# EAGLE board S50_Controller_Rev0_4 (EAGLE 9.6.2)
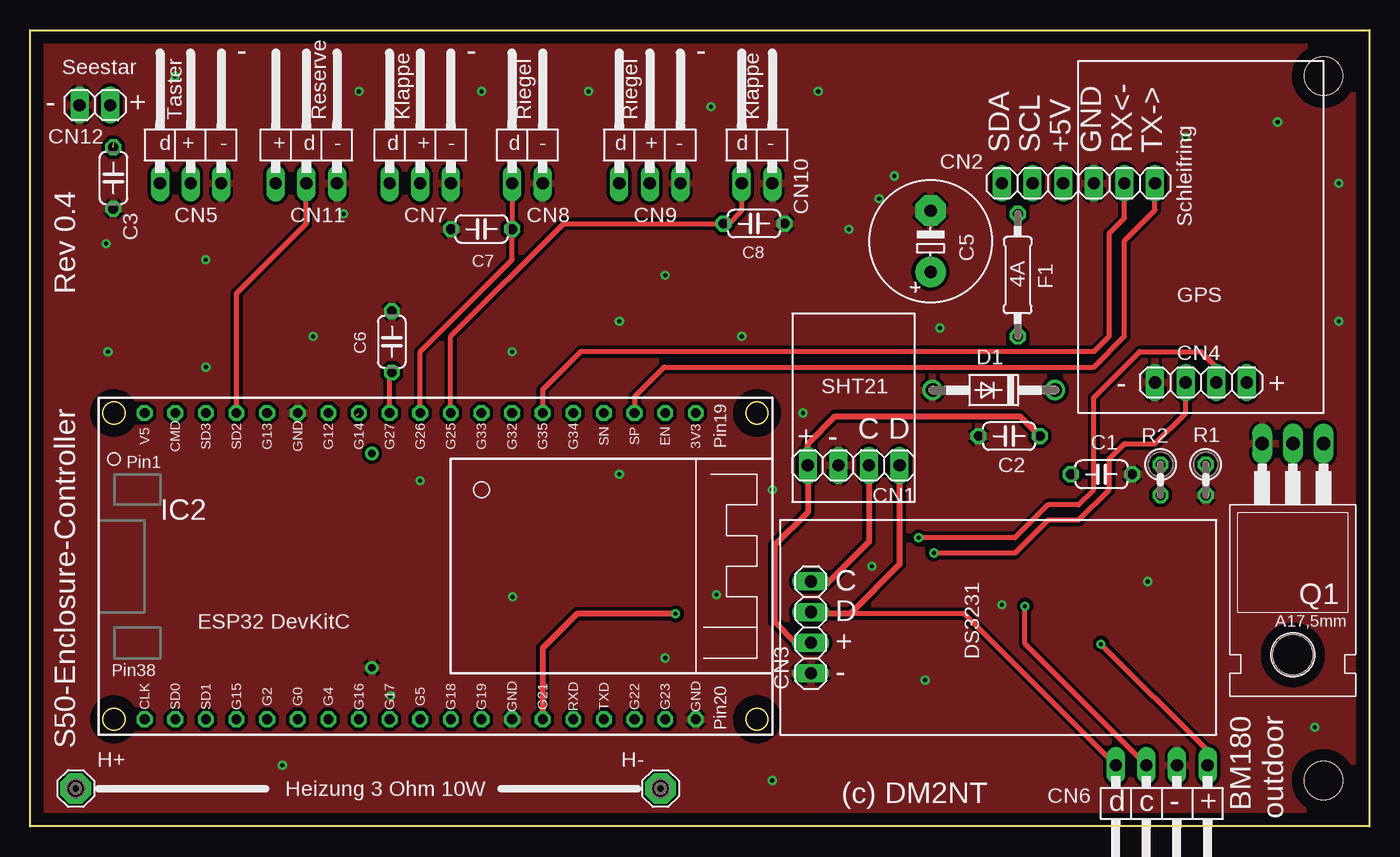
[diagram p0: board, top side]
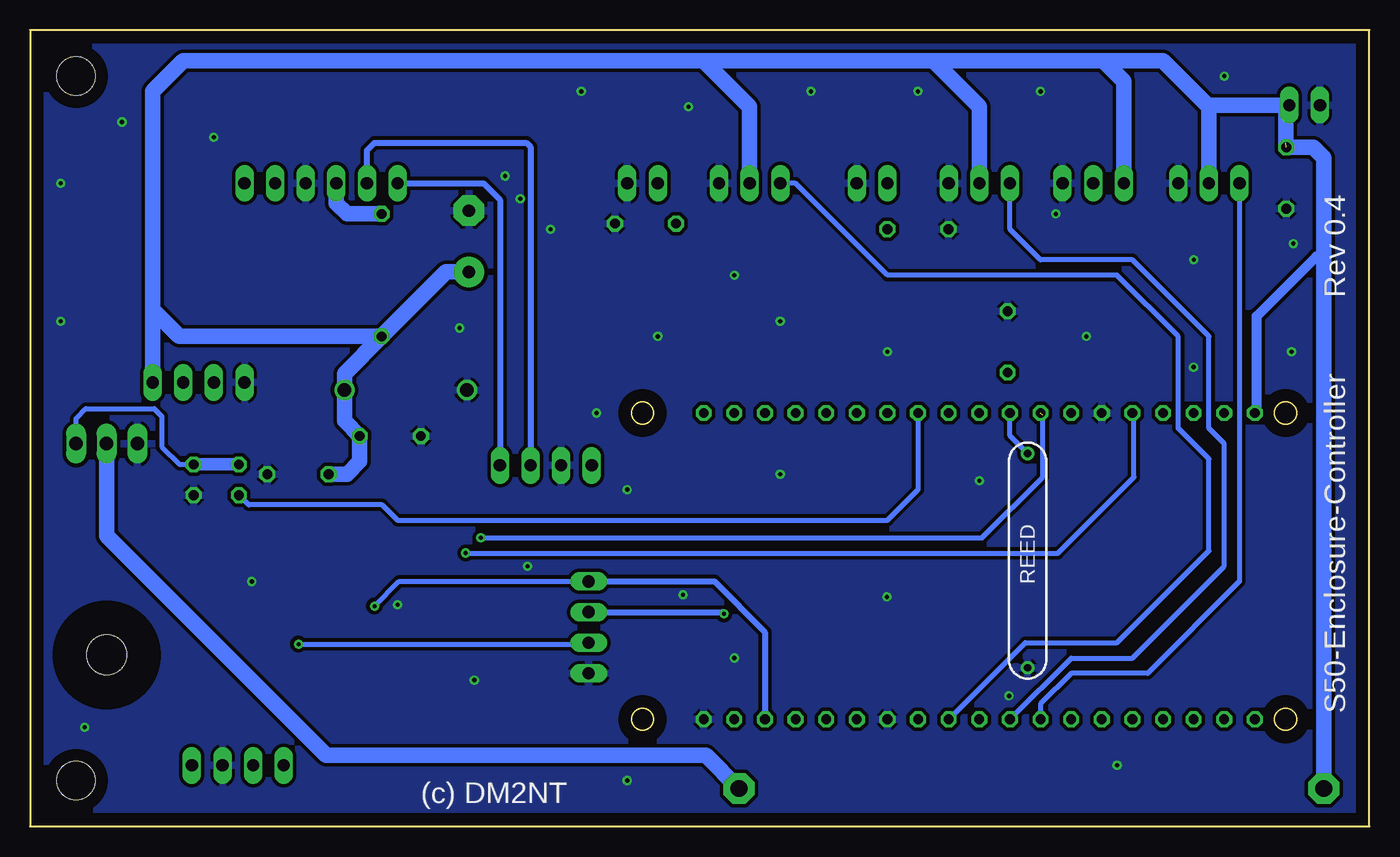
[diagram p1: board, bottom side, seen from below]

Size 111.1 x 66.04 mm. Coordinates in mm from the lower left corner, seen from the top.
Outline: 0,0 0,66.04 111.1,66.04 111.1,0 0,0
Copper layers (1*16): Top 0.035mm / dielectric 1.5mm / Bottom 0.035mm
Design rules "default": minimum track width 6mil, minimum drill 0.35mm, track to track 6mil, track to pad 6mil, pad to pad 6mil, via to via 6mil, smd to smd 6mil, copper to edge 40mil, drill to drill 6mil, minimum pad ring 10mil, minimum via ring 8mil, stop-mask expansion 4mil, vias tented up to drill 0mil, thermal gap 10mil
Holes 3.2 mm at 107.29,3.81 107.29,62.23

## Footprints (pad centres in the part's own frame; a part is rotated, then mirrored left to right if it is on the bottom)
C050-024X044 = drill 0.813 octagon: 1 -2.54,0; 2 2.54,0
E5-10,5 = drill 1.016 pad 2.54: + -2.54,0 | drill 1.016 pad 2.54 octagon: - 2.54,0
1X04 = drill 1.016 long: 1 -3.81,0; 2 -1.27,0; 3 1.27,0; 4 3.81,0
1X06 = drill 1.016 long: 1 -6.35,0; 2 -3.81,0; 3 -1.27,0; 4 1.27,0; 5 3.81,0; 6 6.35,0
1X03/90 = drill 1.016 long: 1 -2.54,-3.81; 2 0,-3.81; 3 2.54,-3.81
1X04/90 = drill 1.016 long: 1 -3.81,-3.81; 2 -1.27,-3.81; 3 1.27,-3.81; 4 3.81,-3.81
1X02/90 = drill 1.016 long: 1 -1.27,-3.81; 2 1.27,-3.81
1X02 = drill 1.016 long: 1 -1.27,0; 2 1.27,0
DO41-10 = drill 1.118: A 5.08,0; C -5.08,0
0207/10 = drill 0.813 octagon: 1 -5.08,0; 2 5.08,0
SE14 = drill 1.397 pad 2.54 octagon: MP 0,0
NODEMCU_ESP32_WROOM_32--38PINS = drill 0.8 octagon: 1 -13.97,-27.94; 2 -13.97,-25.4; 3 -13.97,-22.86; 4 -13.97,-20.32; 5 -13.97,-17.78; 6 -13.97,-15.24; 7 -13.97,-12.7; 8 -13.97,-10.16; 9 -13.97,-7.62; 10 -13.97,-5.08; 11 -13.97,-2.54; 12 -13.97,0; 13 -13.97,2.54; 14 -13.97,5.08; 15 -13.97,7.62; 16 -13.97,10.16; 17 -13.97,12.7; 18 -13.97,15.24; 19 -13.97,17.78; 20 11.43,17.78; 21 11.43,15.24; 22 11.43,12.7; 23 11.43,10.16; 24 11.43,7.62; 25 11.43,5.08; 26 11.43,2.54; 27 11.43,0; 28 11.43,-2.54; 29 11.43,-5.08; 30 11.43,-7.62; 31 11.43,-10.16; 32 11.43,-12.7; 33 11.43,-15.24; 34 11.43,-17.78; 35 11.43,-20.32; 36 11.43,-22.86; 37 11.43,-25.4; 38 11.43,-27.94
TO220 = drill 1.118 long: 1 -2.54,-6.35; 2 0,-6.35; 3 2.54,-6.35 | hole 3.302: 0,11.176
0207/2V = drill 0.813 octagon: 1 -1.27,0; 2 1.27,0
MK6-7 = drill 0.6 pad 1.016: 1 -8.89,0; 2 8.89,0

## Placement (x,y rotation side)
C1  100n  [C050-024X044]  88.88,29.21 0 top
C2  100n  [C050-024X044]  81.22,32.38 0 top
C3  100n  [C050-024X044]  6.9,53.78 270 top
C5  100µF 25V  [E5-10,5]  74.7,48.53 90 top
C6  [C050-024X044]  30.01,40.19 90 top
C7  [C050-024X044]  37.45,49.54 180 top
C8  [C050-024X044]  60.05,50 0 top
CN1  SHT21  [1X04]  68.32,29.95 180 top
CN2  Schleifring  [1X06]  86.97,53.34 0 top
CN3  DS3231  [1X04]  64.77,16.51 90 top
CN4  GPS  [1X04]  97.13,36.83 0 top
CN5  Taster  [1X03/90]  13.31,57.15 0 top
CN6  [1X04/90]  93.87,1.26 180 top
CN7  Klappe  [1X03/90]  32.36,57.15 0 top
CN8  Klappe  [1X02/90]  41.25,57.15 0 top
CN9  Riegel  [1X03/90]  51.41,57.15 0 top
CN10  Riegel  [1X02/90]  60.3,57.15 0 top
CN11  Klappe  [1X03/90]  22.91,57.15 0 top
CN12  Seestar  [1X02]  5.37,59.82 0 top
D1  5,6V Z-Diode  [DO41-10]  79.94,36.19 180 top
F1  3,25A  [0207/10]  81.93,45.72 90 top
H+  [SE14]  3.78,3.15 0 top
H-  [SE14]  52.29,3.15 0 top
IC2  ESP32 DevKitC  [NODEMCU_ESP32_WROOM_32--38PINS]  37.44,20.32 270 top
Q1  IRLZ44N  [TO220]  104.75,25.4 180 top
R1  2,2k  [0207/2V]  97.53,28.75 270 top
R2  200 Ohm  [0207/2V]  93.78,28.75 270 top
REED  Reedkontakt Tubus  [MK6-7]  28.35,22.05 90 bottom

## Library data of the parts
C1-C3 C5-C8 F1 R1 R2 = rcl
CN1-CN12 = pinhead
D1 = diode
H+ H- = solpad
IC2 = ESP32 NODEMCU WROOM 32
Q1 = transistor-fet
REED = switch-reed

## Nets
5V: C1.1 C2.2 C3.1 C5.+ CN1.4 CN3.2 CN4.4 CN5.2 CN6.1 CN7.2 CN9.2 CN11.1 CN12.2 D1.C F1.1 H+.MP IC2.1
GND: C1.2 C2.1 C3.2 C5.- C6.2 C7.2 C8.2 CN1.3 CN2.4 CN3.1 CN4.1 CN5.3 CN6.2 CN7.3 CN8.2 CN9.3 CN10.2 CN11.3 CN12.1 D1.A IC2.6 IC2.20 IC2.26 Q1.3 R1.2 REED.1
S$1: CN5.1 IC2.31
S$2: CN7.1 IC2.30
S$3: CN9.1 IC2.28
S$4: C6.1 IC2.9 REED.2
S$5: C7.1 CN8.1 IC2.10
S$6: C8.1 CN10.1 IC2.11
S$7: H-.MP Q1.2
S$8: Q1.1 R1.1 R2.1
S$9: IC2.12 R2.2
S$10: CN1.1 CN2.1 CN3.3 CN6.4 IC2.25
S$11: CN1.2 CN2.2 CN3.4 CN6.3 IC2.22
S$12: CN4.2 IC2.5
S$13: CN4.3 IC2.8
S$14: CN2.3 F1.2
S$15: CN2.5 IC2.14
S$16: CN2.6 IC2.17
S$17: CN11.2 IC2.4

## Tracks (layer width: path | path; a pad name or v marks a point on that pad's centre or on a via)
5V  (via drill 0.35)  (1 unrouted)
  Top 0.406: CN6.1 97.68,6.27 v88.83,15.12
  Top 0.508: CN3.2 63.51,15.24 61.74,17.01 61.74,23.31 64.51,26.08 CN1.4 64.51,31.75 66.78,34.02 82.12,34.02 C2.2
  Bottom 0.406: v88.83,15.12 64.89,15.12 CN3.2
  Bottom 0.813: IC2.1 9.34,34.45 9.34,42.32 4.41,47.25 3.78,47.25
  Bottom 1.016: CN5.2 13.31,55.88
  Bottom 1.27: 100.94,42.84 100.94,60.96 98.4,63.5 55.22,63.5 | 100.94,42.84 CN4.4 | 22.05,63.5 17.12,63.5 13.31,59.69 | 22.05,63.5 36.17,63.5 | 36.17,63.5 55.22,63.5 | CN5.2 13.31,59.69 | CN7.2 32.36,59.69 36.17,63.5 | CN9.2 51.41,59.69 55.22,63.5 | 100.94,42.84 98.74,40.64 F1.1 | C1.1 84.82,29.21 83.76,30.27 C2.2 85.02,33.64 D1.C 85.02,37.55 F1.1 | C5.+ 76.58,45.99 F1.1 | CN11.1 20.37,61.82 22.05,63.5 | 13.31,59.69 13.18,59.82 CN12.2 6.93,59.53 6.93,56.7 | C3.1 4.66,56.32 3.78,55.44 3.78,47.25 H+.MP
GND  (via drill 0.35)
  other vias: 14.58,38.1 14.57,47 26.01,50.8 27.28,60.96 12.04,62.23 6.32,48.34 65.38,60.96 56.49,59.69 46.33,60.96 37.44,60.96 95.86,57.15 103.48,58.42 108.56,53.34 108.56,41.91 92.71,20.32 80.62,18.4 74.25,12.14 40.03,19.04 29.89,10.83 52.68,13.97 48.87,29.21 39.98,39.37 32.36,28.67 23.47,40.64 52.68,45.72 48.87,41.91 67.92,49.53 59.03,40.64 64.11,34.29 61.57,27.94 106.57,8.22 61.57,3.81 20.93,5.07 75.48,41.34 70.44,52.05 71.7,53.94 56.93,19.22 69.84,21.59 6.46,39.38
  pour Bottom (isolate 0.305): 0,0 111.1,0 111.1,66.04 0,66.04
  pour Top (isolate 0.305): 0,0 111.1,0 111.1,66.04 0,66.04
S$1
  Bottom 0.406: IC2.31 27.28,10.16 24.74,12.7 18.39,12.7 10.77,20.32 CN5.1
S$2
  Bottom 0.406: IC2.30 24.74,13.97 19.66,13.97 12.04,21.59 12.04,31.75 13.31,33.02 13.31,40.64 19.66,46.99 27.28,46.99 29.82,49.53 CN7.1
S$3
  Bottom 0.406: IC2.28 28.55,15.24 20.93,15.24 13.31,22.86 13.31,30.48 15.85,33.02 15.85,40.64 20.93,45.72 39.98,45.72 47.6,53.34 CN9.1
S$4
  Top 0.406: IC2.9 29.82,37.46 C6.1
  Bottom 0.406: REED.2 29.82,32.41 IC2.9
S$5
  Top 0.406: CN8.1 C7.1 39.99,47 32.36,39.37 IC2.10
S$6
  Top 0.406: CN10.1 59.03,51.07 57.96,50 C8.1 44.26,50 34.9,40.64 IC2.11
S$7
  Bottom 1.27: Q1.2 104.75,24.11 86.53,5.89 55.03,5.89 H-.MP
S$8
  Bottom 0.406: Q1.1 107.29,33.83 106.47,34.65 100.8,34.65 100.17,34.02 100.17,31.5 98.69,30.02 R1.1
  Bottom 1.016: R2.1 R1.1
S$9
  Bottom 0.406: IC2.12 37.44,27.94 39.98,25.4 80.62,25.4 81.89,26.67 92.97,26.67 R2.2
S$10  (via drill 0.35)
  Top 0.406: CN6.4 77.49,17.64 68.04,17.64
  Top 0.508: CN1.1 72.13,21.73 68.04,17.64 64.91,17.64 CN3.3 | v53.55,17.64 45.36,17.64 42.52,14.8 IC2.25
  Bottom 0.508: CN2.1 73.5,53.34 72.13,51.97 CN1.1 | CN3.3 53.69,17.78 v53.55,17.64
S$11  (via drill 0.35)
  Top 0.406: CN6.3 82.53,15.14 v82.53,18.27
  Top 0.508: CN1.2 69.59,23.6 66.15,20.16 64.93,20.16 CN3.4
  Bottom 0.406: v82.53,18.27 80.48,20.32 CN3.4
  Bottom 0.508: CN2.2 83.16,56.07 82.53,56.7 69.93,56.7 69.59,56.36 CN1.2 | CN3.4 54.34,20.32 50.14,16.12 IC2.22
S$12  (via drill 0.35)
  Top 0.406: CN4.2 95.86,34.29 93.32,31.75 90.78,31.75 89.51,30.48 89.51,27.94 86.97,25.4 84.43,25.4 81.71,22.68 v74.97,22.68
  Bottom 0.406: v74.97,22.68 25.83,22.68 19.53,28.98 19.53,34.16 IC2.5
S$13  (via drill 0.35)  (1 unrouted)
  Top 0.406: CN4.3 98.4,38.1 97.13,39.37 92.05,39.37 88.24,35.56 88.24,27.94 86.97,26.67 84.43,26.67 81.7,23.94 v73.71,23.94
  Bottom 0.406: v73.71,23.94 32.13,23.94 27.09,28.98 27.09,34.1
S$14
  Bottom 1.27: F1.2 84.82,50.8 85.7,51.68 CN2.3
S$15
  Top 0.406: IC2.14 42.52,36.22 45.67,39.37 88.24,39.37 89.51,40.64 89.51,49.19 90.78,50.46 CN2.5
S$16
  Top 0.406: IC2.17 50.14,35.65 52.59,38.1 88.24,38.1 90.78,40.64 90.78,48.57 93.32,51.11 CN2.6
S$17
  Top 0.406: IC2.4 17.12,44.21 22.91,50 CN11.2

## Text on the board
tPlace: Seestar | - | - | - | - | + | Taster | Reserve | Klappe | Riegel | Riegel | Klappe | d | + | - | + | d | - | d | + | - | d | - | d | + | - | d | - | SDA | SCL | +5V | GND | RX<- | TX-> | Schleifring | 4A | Rev 0.4 | GPS | SHT21 | - | + | + | - | C | D | C | D | ESP32 DevKitC | + | DS3231 | - | S50-Enclosure-Controller | Heizung 3 Ohm 10W | (c) DM2NT | d | c | - | + | BM180 / outdoor
bPlace: Rev 0.4 | S50-Enclosure-Controller | (c) DM2NT